# EAGLE board charge_controller (EAGLE 9.5.1)
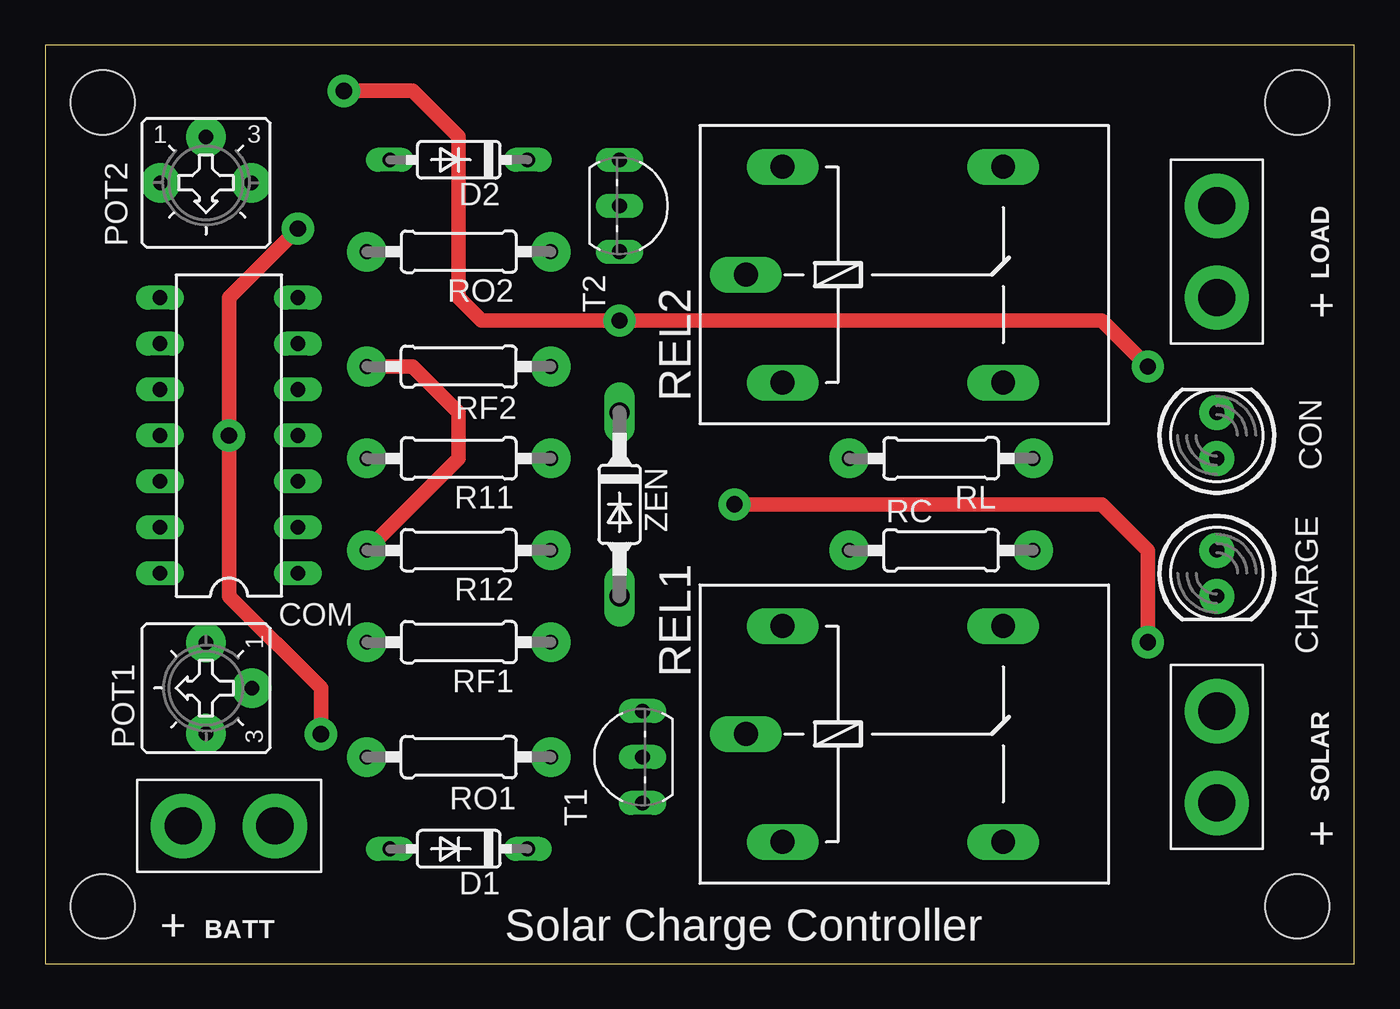
[diagram p0: board, top side]
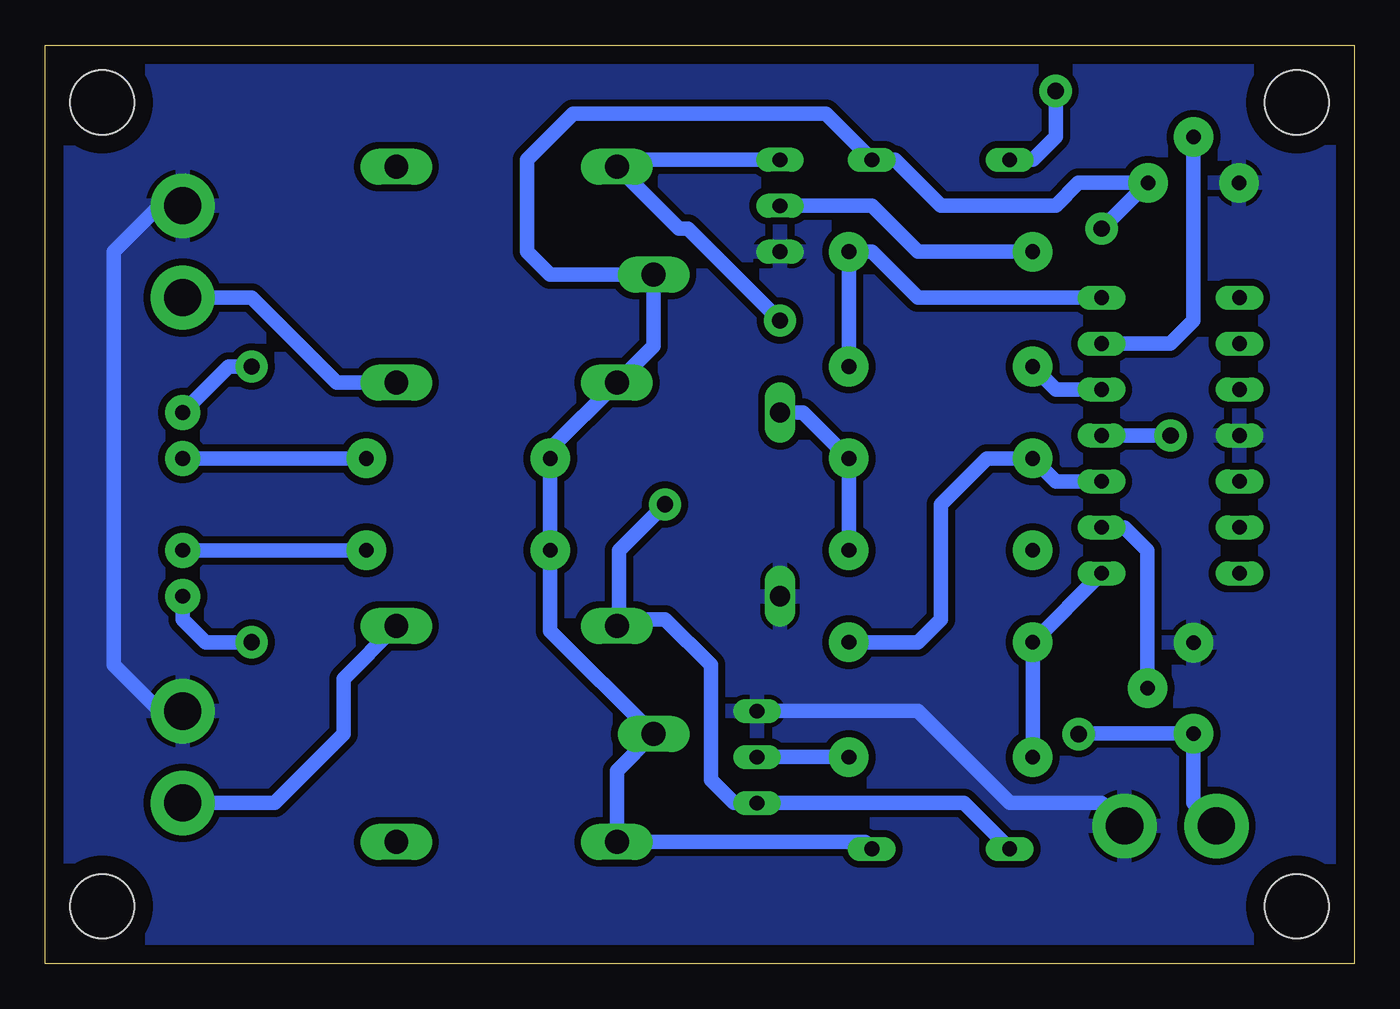
[diagram p1: board, bottom side, seen from below]

Size 72.37 x 50.79 mm. Coordinates in mm from the lower left corner, seen from the top.
Outline: 0,0 72.37,0 72.37,50.79 0,50.79 0,0
Copper layers (1*16): Top 0.035mm / dielectric 1.5mm / Bottom 0.035mm
Design rules "default *": minimum track width 6mil, minimum drill 0.35mm, track to track 15mil, track to pad 15mil, pad to pad 15mil, via to via 15mil, smd to smd 6mil, copper to edge 40mil, drill to drill 6mil, minimum pad ring 10mil, minimum via ring 8mil, stop-mask expansion 4mil, vias tented up to drill 0mil, thermal gap 10mil
Holes 3.56 mm at 3.17,3.17 3.17,47.62 69.22,47.62 69.22,3.17

## Footprints (pad centres in the part's own frame; a part is rotated, then mirrored left to right if it is on the bottom)
1X02_XTRA_BIG = drill 2.057 pad 3.556: 1 -2.54,0; 2 2.54,0
LED5MM = drill 0.813 pad 1.93: A -1.27,0; K 1.27,0
DIL14 = drill 0.813 long: 1 -7.62,-3.81; 2 -5.08,-3.81; 3 -2.54,-3.81; 4 0,-3.81; 5 2.54,-3.81; 6 5.08,-3.81; 7 7.62,-3.81; 8 7.62,3.81; 9 5.08,3.81; 10 2.54,3.81; 11 0,3.81; 12 -2.54,3.81; 13 -5.08,3.81; 14 -7.62,3.81
DO35-7 = drill 0.813 long: A 3.81,0; C -3.81,0
CT6 = drill 0.813 pad 2.184: A 2.515,0; E -2.515,0; S 0,-2.54
0207/10 = drill 0.813 pad 2.184: 1 -5.08,0; 2 5.08,0
G5LE = drill 1.321 long: 1 -7.493,-5.969; 2 -7.493,5.969; O 4.699,5.969; P -9.525,0; S 4.699,-5.969
TO92-CBE = drill 0.813 long: B 0,0; C -2.54,0; E 2.54,0
SOD81 = drill 1.118 long: A 5.08,0; C -5.08,0

## Placement (x,y rotation side)
BATT  [1X02_XTRA_BIG]  10.16,7.62 180 top
CHARGE  [LED5MM]  64.77,21.59 270 top
COM  LM324N  [DIL14]  10.16,29.21 90 top
CON  [LED5MM]  64.77,29.21 90 top
D1  1N4148DO35-7  [DO35-7]  22.86,6.35 180 top
D2  1N4148DO35-7  [DO35-7]  22.86,44.45 180 top
LOAD  [1X02_XTRA_BIG]  64.77,39.37 270 top
POT1  100k  [CT6]  8.89,15.24 90 top
POT2  100k  [CT6]  8.89,43.18 180 top
R11  10k  [0207/10]  22.86,27.94 180 top
R12  10k  [0207/10]  22.86,22.86 180 top
RC  330  [0207/10]  49.53,22.86 0 top
REL1  G5L  [G5LE]  48.26,12.7 0 top
REL2  G5L  [G5LE]  48.26,38.1 0 top
RF1  200k  [0207/10]  22.86,17.78 180 top
RF2  120k  [0207/10]  22.86,33.02 0 top
RL  330  [0207/10]  49.53,27.94 180 top
RO1  10k  [0207/10]  22.86,11.43 0 top
RO2  10k  [0207/10]  22.86,39.37 180 top
SOLAR  [1X02_XTRA_BIG]  64.77,11.43 270 top
T1  [TO92-CBE]  33.02,11.43 90 top
T2  [TO92-CBE]  31.75,41.91 270 top
ZEN  BZD23  [SOD81]  31.75,25.4 270 top

## Library data of the parts
BATT LOAD SOLAR = atick_connector
CHARGE CON = atick_led
COM = linear
D1 D2 ZEN = diode
POT1 POT2 = pot_atick
R11 R12 RC RF1 RF2 RL RO1 RO2 = atick_rcl; SPICEPREFIX: R
REL1 REL2 = atick_relay; OC_FARNELL: unknown; OC_NEWARK: unknown
T1 T2 = transistor

## Nets
GND: BATT.1 COM.11 LOAD.1 POT1.A POT2.A SOLAR.1 T1.E T2.E ZEN.A
N$1: COM.3 R11.2 RF1.1
N$2: COM.5 R12.2 RF2.1
N$3: COM.2 POT1.S
N$4: COM.6 POT2.S
N$5: R11.1 R12.1 ZEN.C
N$6: COM.7 RF2.2 RO2.1
N$7: COM.1 RF1.2 RO1.1
N$8: RO1.2 T1.B
N$9: RO2.2 T2.B
N$10: CON.K D2.A REL2.2 T2.C
N$11: REL1.O SOLAR.2
N$12: CHARGE.K D1.A REL1.2 T1.C
N$13: LOAD.2 REL2.S
N$14: BATT.2 COM.4 D1.C D2.C POT1.E POT2.E RC.1 REL1.1 REL1.P REL2.1 REL2.P RL.2
N$15: CHARGE.A RC.2
N$18: CON.A RL.1

## Tracks (layer width: path | path; a pad name or v marks a point on that pad's centre or on a via)
GND
  Bottom 0.813: LOAD.1 66.04,41.91 68.58,39.37 68.58,16.51 66.04,13.97 SOLAR.1 | BATT.1 13.97,8.89 19.05,8.89 24.13,13.97 T1.E
  pour Bottom: -1.27,52.07 -1.27,-1.27 73.66,-1.27 73.66,52.07
N$1
  Bottom 0.813: COM.3 16.51,26.67 R11.2 20.32,27.94 22.86,25.4 22.86,19.05 24.13,17.78 RF1.1
N$2
  Top 0.813: RF2.1 20.32,33.02 22.86,30.48 22.86,27.94 R12.2
  Bottom 0.813: COM.5 16.51,31.75 RF2.1
N$3
  Bottom 0.813: POT1.S 11.43,22.86 12.7,24.13 COM.2
N$4
  Bottom 0.813: POT2.S 8.89,35.56 10.16,34.29 COM.6
N$5
  Bottom 0.813: ZEN.C 30.48,30.48 R11.1 R12.1
N$6
  Bottom 0.813: RF2.2 RO2.1 26.67,39.37 24.13,36.83 COM.7
N$7
  Bottom 0.813: RO1.1 RF1.2 COM.1
N$8
  Bottom 0.813: RO1.2 T1.B
N$9
  Bottom 0.813: RO2.2 24.13,39.37 26.67,41.91 T2.B
N$10  (via drill 0.9 pad 1.78)
  Top 0.813: v16.51,48.26 20.32,48.26 22.86,45.72 22.86,36.83 24.13,35.56 v31.75,35.56 58.42,35.56 v60.96,33.02
  Bottom 0.813: T2.C 40.39,44.45 REL2.2 37.34,40.64 36.83,40.64 v31.75,35.56 | v16.51,48.26 16.51,45.72 17.78,44.45 D2.A | v60.96,33.02 62.23,33.02 CON.K
N$11
  Bottom 0.813: REL1.O 55.88,15.75 55.88,12.7 59.69,8.89 SOLAR.2
N$12  (via drill 0.9 pad 1.78)
  Top 0.813: v38.1,25.4 58.42,25.4 60.96,22.86 v60.96,17.78
  Bottom 0.813: D1.A 21.59,8.89 T1.C 34.29,8.89 35.56,10.16 35.56,16.51 38.1,19.05 40.39,19.05 REL1.2 40.64,18.8 40.64,22.86 v38.1,25.4 | v60.96,17.78 63.5,17.78 64.77,19.05 CHARGE.K
N$13
  Bottom 0.813: REL2.S 56.26,32.13 60.96,36.83 LOAD.2
N$14  (via drill 0.9 pad 1.78)
  Top 0.813: v15.24,12.7 15.24,15.24 10.16,20.32 v10.16,29.21 10.16,36.83 v13.97,40.64
  Bottom 0.813: D1.C 27.05,6.73 REL1.1 40.77,10.67 REL1.P 44.45,18.41 RC.1 RL.2 44.45,28.45 REL2.1 38.73,34.16 REL2.P 44.45,38.1 45.72,39.37 45.72,44.45 43.18,46.99 29.21,46.99 D2.C 25.4,44.45 22.86,41.91 16.51,41.91 15.24,43.18 POT2.E 13.95,40.64 v13.97,40.64 | BATT.2 8.89,8.89 POT1.E 15.21,12.72 v15.24,12.7 | v10.16,29.21 COM.4
N$15
  Bottom 0.813: RC.2 CHARGE.A
N$18
  Bottom 0.813: CON.A RL.1

## Text on the board
tNames: + | + | + | Solar Charge Controller